# Altium PCB DevKit.PcbDoc
Units mm, origin at the board's own origin, x right, y up, seen from the top; angles counter-clockwise.
Board outline 68.58 x 53.34 mm, 2 copper layers (Top Layer, Bottom Layer); 24 components, 21 nets, 88 pads, 14 vias.
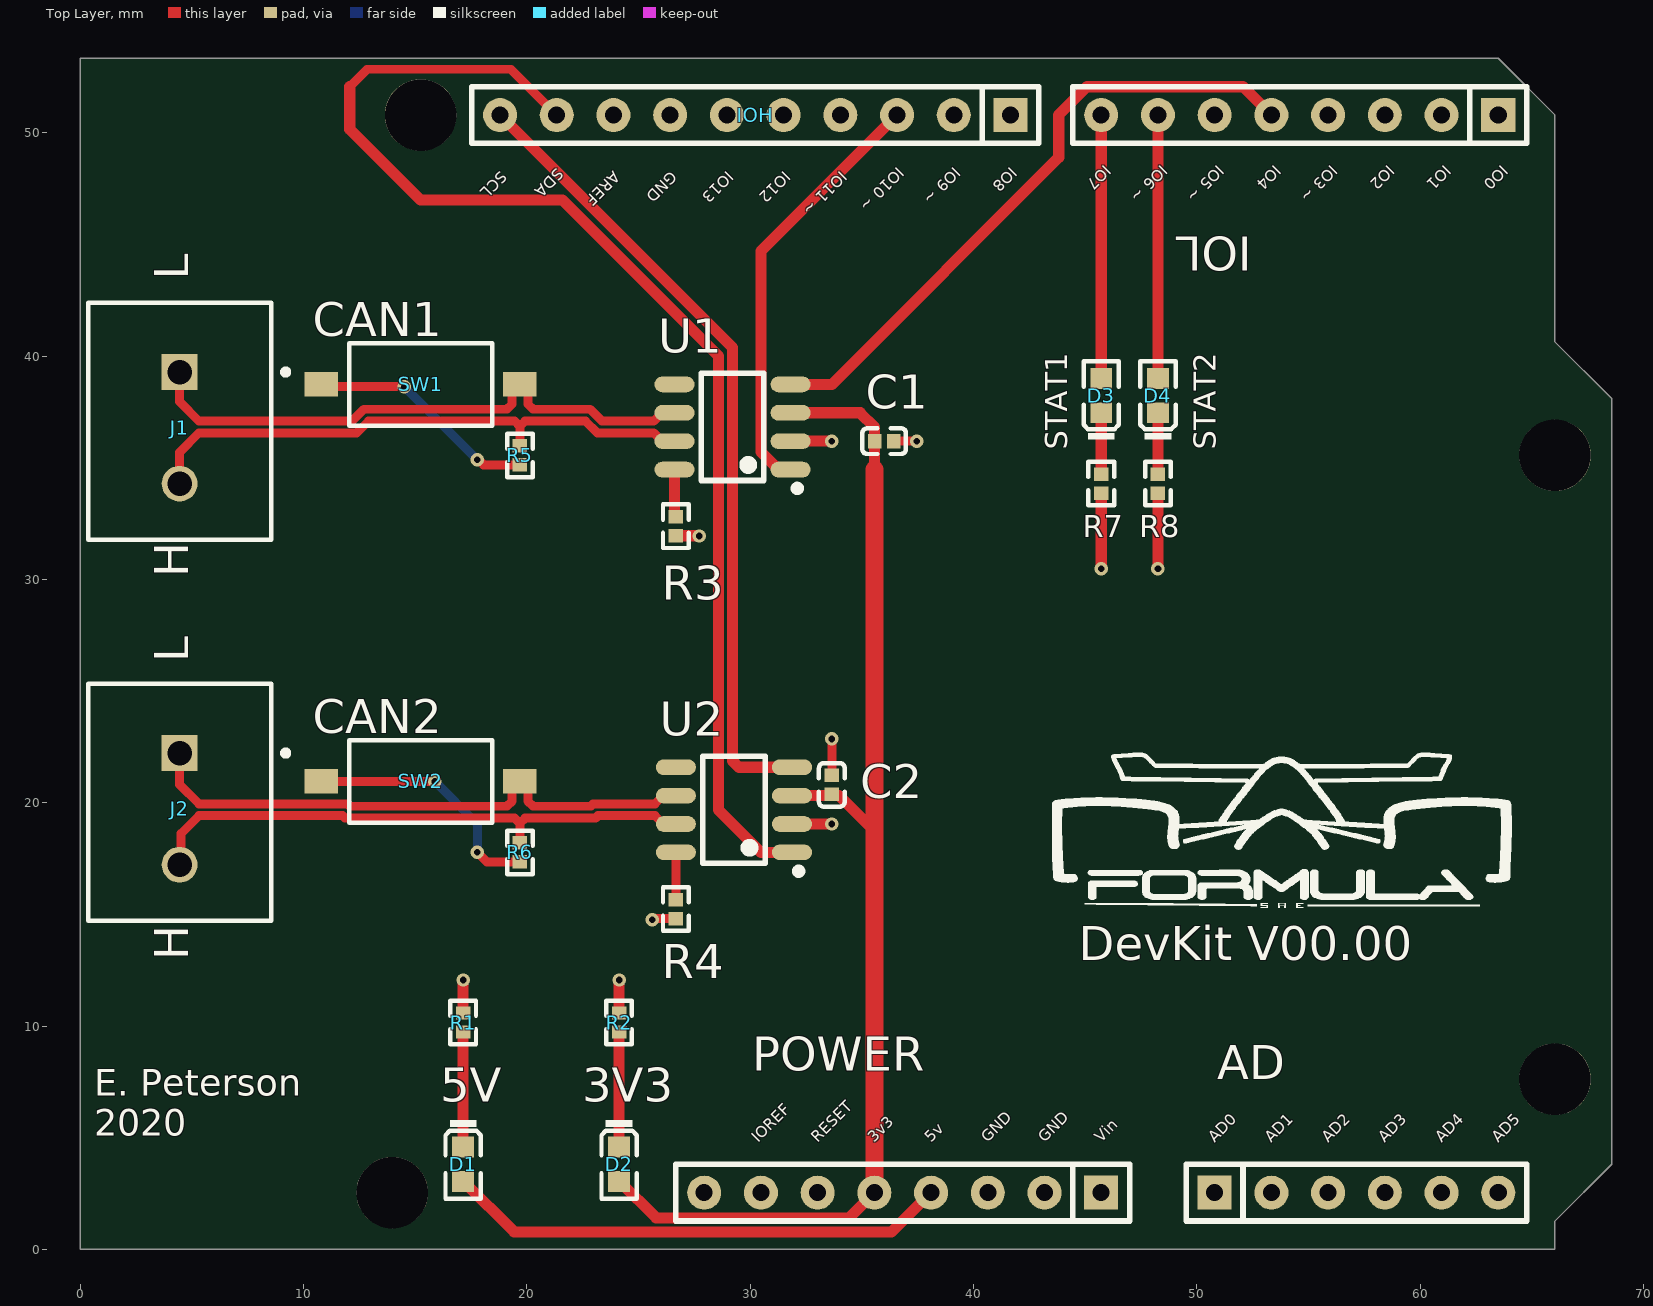
[diagram p0: Top Layer view]
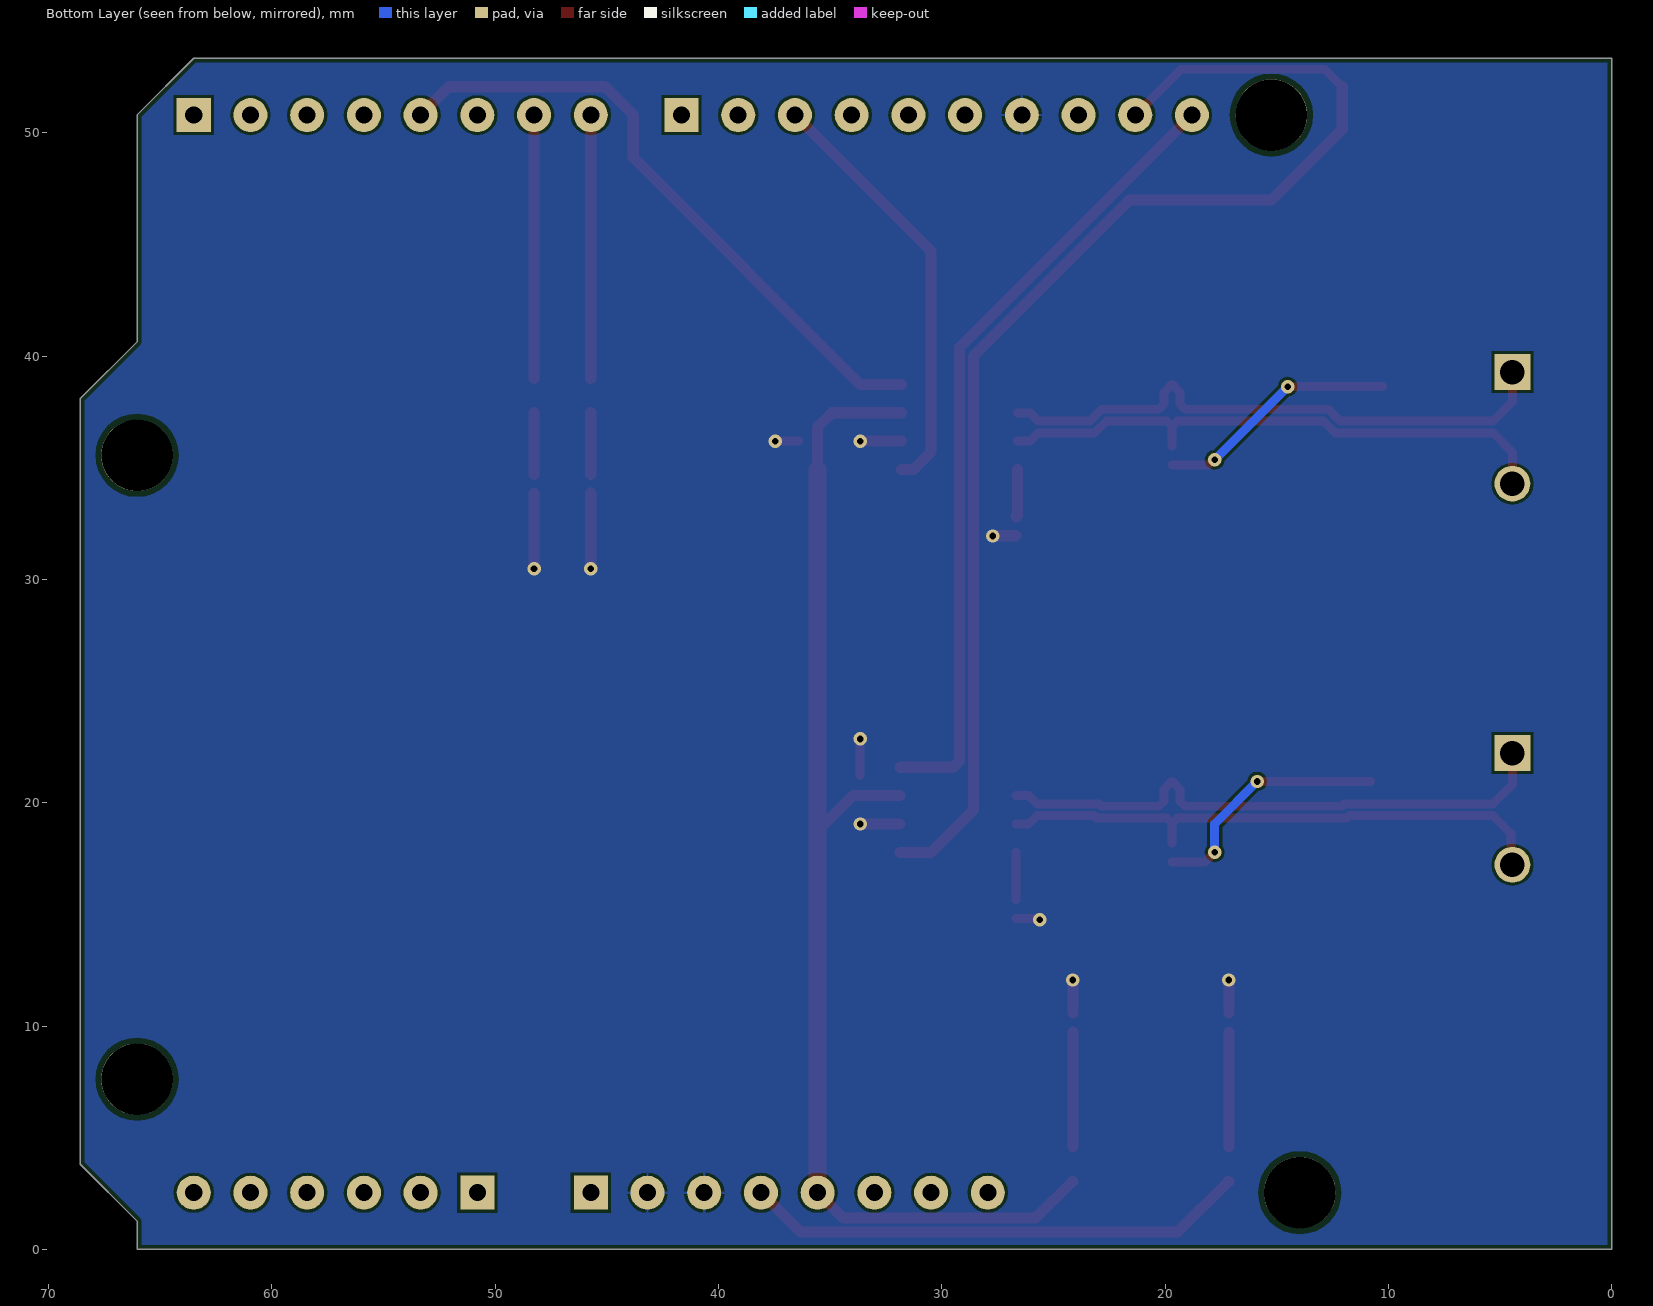
[diagram p1: Bottom Layer view, seen from below]
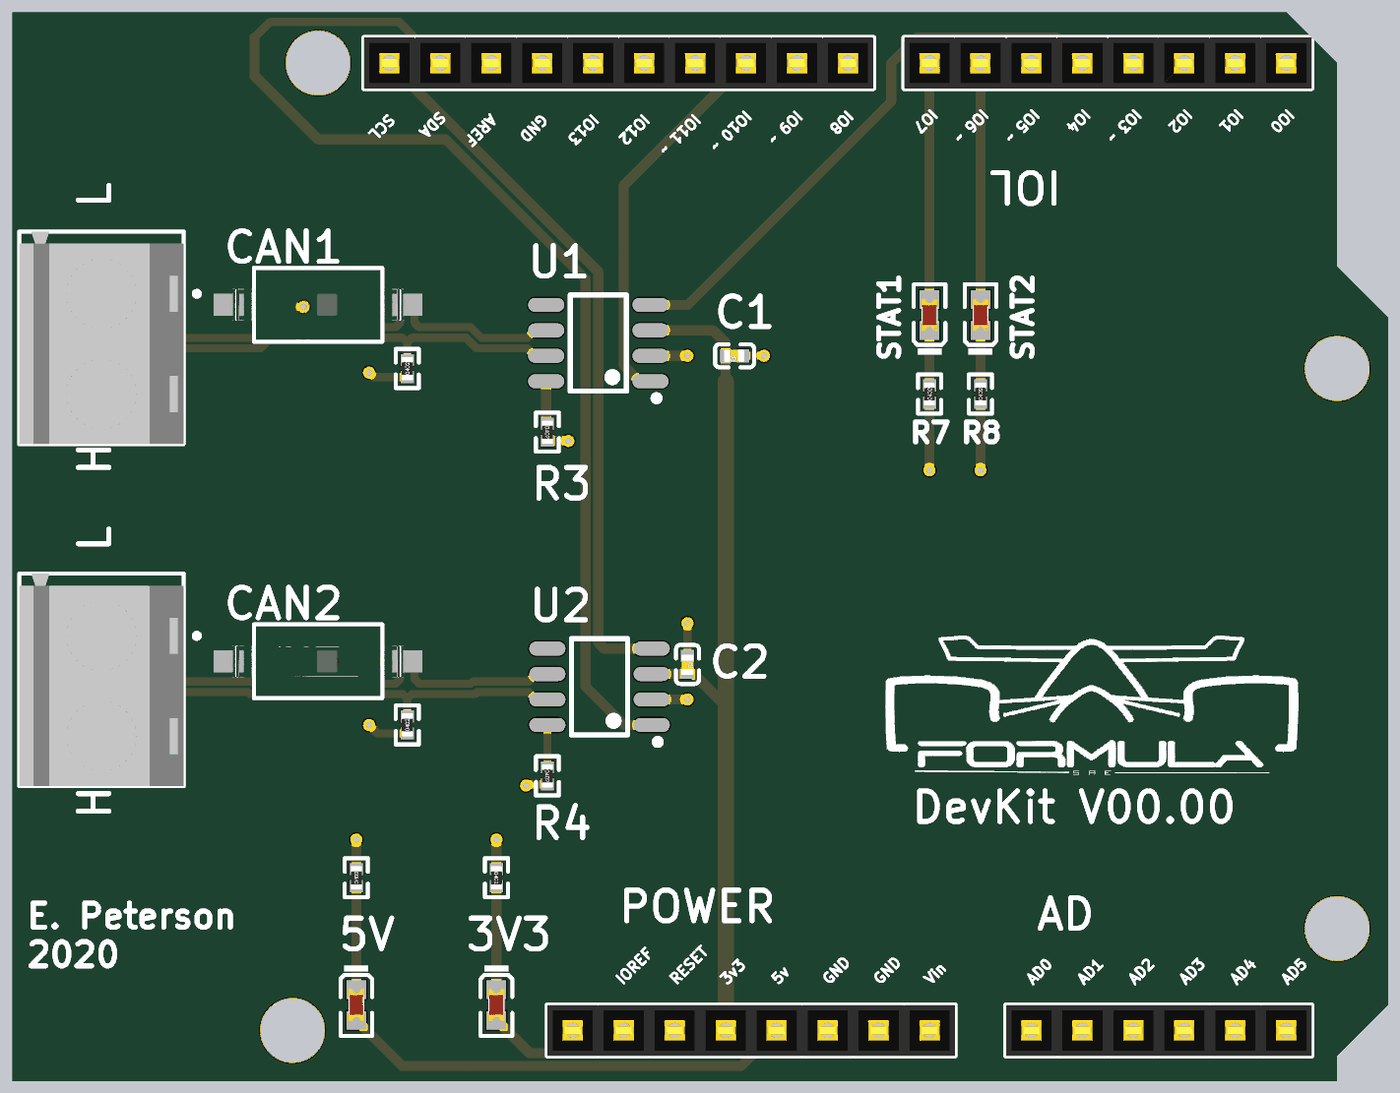
[diagram p2: 3D render of the assembled board from above, using the file's embedded part models]

## Layer stack, top to bottom
Top Solder: solder mask 0.0102, Solder Resist, Dk 3.5
Top Layer: signal copper 0.0356
Dielectric1: dielectric 0.32, FR-4, Dk 4.8
Bottom Layer: signal copper 0.0356
Bottom Solder: solder mask 0.0102, Solder Resist, Dk 3.5

## Board outline
0,0 0,53.34 63.5,53.34 66.04,50.8 66.04,40.64 68.58,38.1 68.58,3.81 66.04,1.27 66.04,0

## Design rules (kind name [scope] priority, off if disabled: settings)
BoardOutlineClearance [All] p1: gap=0.2 ignorepadtopadclearanceinfootprint=FALSE
Clearance [All] p1: gap=0.127 ignorepadtopadclearanceinfootprint=FALSE except(0.25: Arc-Hole Track-Hole SMDPad-Hole THPad-Hole Via-Hole Fill-Hole Poly-Hole Region-Hole Text-Hole)
ComponentClearance [All] p1: gap=0.127 collisioncheckmode=3 verticalgap=0.127 showdistances=TRUE
DiffPairsRouting [All] p1: maxlimit=0.254 minlimit=0.127 mostfreqgap=0.127 toplayer_minwidth=0.127 toplayer_maxwidth=25.4 toplayer_prefwidth=0.127 bottomlayer_minwidth=0.127 bottomlayer_maxwidth=25.4 bottomlayer_prefwidth=0.127 maxuncoupledlength=12.7
Height [All] p1: minheight=0 maxheight=1816.048 prefheight=12.7
HoleSize [All] p1: absolutevalues=TRUE maxlimit=6.3 minlimit=0.3 maxpercent=80.000 minpercent=20.000
HoleToHoleClearance [All] p1: gap=0.25 allowstackedmicrovias=FALSE
MinimumAnnularRing [All] p1: minimumring=0.076
MinimumSolderMaskSliver [All] p1: minsoldermaskwidth=0
PlaneClearance [All] p1: clearance=0.127
PlaneConnect PlaneConnectPowerPads [InPadClass('PowerPads')] p1: planeconnectstyle=Direct reliefexpansion=0.508 reliefentries=4 reliefconductorwidth=0.254 reliefairgap=0.254
PlaneConnect [All] p2: pad.planeconnectstyle=Relief pad.reliefexpansion=0.3 pad.reliefentries=4 pad.reliefconductorwidth=0.127 pad.reliefairgap=0.127 via.planeconnectstyle=Direct via.reliefexpansion=0.3 via.reliefentries=4 via.reliefconductorwidth=0.127 via.reliefairgap=0.127
PolygonConnect PolygonConnectPowerPads [All vs (InPadClass('PowerPads'))] p1: connectstyle=Direct reliefconductorwidth=0.254 reliefentries=4 polygonreliefangle="90 Angle" airgapwidth=0.254
PolygonConnect [All] p2: thpad.connectstyle=Relief thpad.reliefconductorwidth=0.127 thpad.reliefentries=4 thpad.polygonreliefangle="90 Angle" thpad.airgapwidth=0.127 smdpad.connectstyle=Relief smdpad.reliefconductorwidth=0.127 smdpad.reliefentries=4 smdpad.polygonreliefangle="90 Angle" smdpad.airgapwidth=0.127 via.connectstyle=Direct via.reliefconductorwidth=0.127 via.reliefentries=4 via.polygonreliefangle="90 Angle" via.airgapwidth=0.127
RoutingVias [All] p1: holewidth=0.3 width=0.6 viastyle="Through Hole" minholewidth=0.3 minwidth=0.6 maxholewidth=0.6 maxwidth=6.6
SilkToSilkClearance [All] p1: silktosilkclearance=0
SilkToSolderMaskClearance [IsPad] p1: minsilkscreentomaskgap=0.127 clearancetoexposedcopper=TRUE
SolderMaskExpansion [All] p1: expansion=0.075 istentingtop=FALSE
Width [All] p1: maxlimit=25.4 minlimit=0.127 preferedwidth=0.127 minimp=50.000000 maximp=50.000000 favimp=50.000000
20 further rules are at their usual default settings.

## Classes and differential pairs
differential pair CAN2: +CAN2_P -CAN2_N
differential pair CAN1: +CAN1_P -CAN1_N

## Components (designator, comment, footprint, x,y, rotation, side; value= is the part's Value field where it differs from the comment)
AD "AD" "Header 6x1 8.5mm" 50.8,2.54 r0 top locked
C1 "100nF" 0402_C 36,36.195 r180 top
C2 "100nF" 0402_C 33.655,20.8 r270 top
D1 "0603 Green" 0603_LED_S1 17.145,3.81 r270 top
D2 "0603 Yellow" 0603_LED_S1 24.13,3.81 r270 top
D3 "0603 Blue" 0603_LED_S1 45.72,38.235 r90 top
D4 "0603 Blue" 0603_LED_S1 48.26,38.235 r90 top
IOH "IOH" "Header 10x1 8.5mm" 41.656,50.8 r180 top locked
IOL "IOL" "Header 8x1 8.5mm" 63.5,50.8 r180 top locked
J1 "282836-2" TECO-282836-2_V 4.445,36.79 r270 top
J2 "282836-2" TECO-282836-2_V 4.445,19.725 r270 top
POWER "POWER_UNO" "Header 8x1 8.5mm" 45.72,2.54 r180 top locked
R1 "470Ω ±1%" 0402_R 17.145,10.16 r90 top
R2 "330Ω ±1%" 0402_R 24.13,10.16 r270 top
R3 "10KΩ ±1%" 0402_R 26.67,32.385 r270 top
R4 "10KΩ ±1%" 0402_R 26.67,15.24 r270 top
R5 "120Ω ±1%" 0402_R 19.685,35.56 r90 top
R6 "120Ω ±1%" 0402_R 19.685,17.78 r90 top
R7 "330Ω ±1%" 0402_R 45.72,34.29 r90 top
R8 "330Ω ±1%" 0402_R 48.26,34.29 r90 top
SW1 "A6S-1104-H" FP-A6S-1104-H-MFG 15.24,38.735 r270 top
SW2 "A6S-1104-H" FP-A6S-1104-H-MFG 15.24,20.955 r270 top
U1 "CAN/SN65HVD230DR" SOIC-8_150mil 29.21,36.83 r90 top
U2 "CAN/SN65HVD230DR" SOIC-8_150mil 29.27,19.685 r90 top

## Footprints (in the part's own frame and the unit in brackets; to place one, negate y for a bottom-side part, rotate by r counter-clockwise, add the part's x,y. Pads: shape width x height; smd on the part's side, far side on the other; paste and mask are expansions set on the pad)
0402_C [mm]
  rect 0.6x0.65 smd mask+0.051: 1(-0.425,0) 2(0.425,0)
  silkscreen extent -0.97,-0.58 0.97,0.58, body extent -0.48,-0.3 0.52,0.3, height 0.2
0402_R [mm]
  rect 0.6x0.65 smd mask+0.051: 1(-0.425,0) 2(0.425,0)
  silkscreen extent -0.97,-0.58 0.97,0.58, body extent -0.57,-0.27 0.58,0.28, height 0.41
0603_LED_S1 [mm]
  rect 0.93x0.98 smd: A(0.77,0) K(-0.77,0)
  silkscreen extent -1.98,-0.79 1.54,0.79, body extent -0.8,-0.4 0.8,0.4, height 0.6
FP-A6S-1104-H-MFG [mm]
  rect 1.1x1.5 smd paste+0 mask+0: 1(0,-4.45) 2(0,4.45)
  silkscreen extent -1.84,-3.2 1.84,3.2, body extent -1.94,-5.3 1.94,5.3, height 0.25
"Header 6x1 8.5mm" [mil] "Stackable 6 pin header"
  rect 60x60 hole 30: 1(0,0)
  round 60 hole 30: 2(100,0) 3(200,0) 4(300,0) 5(400,0) 6(500,0)
  silkscreen extent -50,-50 550,50, body extent -50,-50 550,50, height 335
"Header 8x1 8.5mm" [mil] "Stackable 8 pin header"
  rect 60x60 hole 30: 1(0,0)
  round 60 hole 30: 2(100,0) 3(200,0) 4(300,0) 5(400,0) 6(500,0) 7(600,0) 8(700,0)
  silkscreen extent -50,-50 750,50, body extent -50,-50 750,50, height 335
"Header 10x1 8.5mm" [mil] "Stackable 10 pin header"
  rect 60x60 hole 30: 1(0,0)
  round 60 hole 30: 2(100,0) 3(200,0) 4(300,0) 5(400,0) 6(500,0) 7(600,0) 8(700,0) 9(800,0) 10(900,0)
  silkscreen extent -50,-50 950,50, body extent -50,-50 950,50, height 335
SOIC-8_150mil [mm]
  oval 0.7x1.8 smd: 1(-1.905,-2.6) 2(-0.635,-2.6) 3(0.635,-2.6) 4(1.905,-2.6) 5(1.905,2.6) 6(0.635,2.6) 7(-0.635,2.6) 8(-1.905,2.6)
  silkscreen extent -2.9,-3.05 2.4,1.4
TECO-282836-2_V [mm] "Female Header, Pitch 5mm, 1 x 2 Position, Height 10mm"
  rect 1.6x1.6 hole 1.1: 1(-2.5,0)
  round 1.6 hole 1.1: 2(2.5,0)
  silkscreen extent -5.6,-4.1 5,4.88, body extent -5.6,-4.1 5,4.1, height 10

## Part data
AD: Supplier Part Number 1=2699089, Supplier 1=Arrow, Supplier 2=Digi-Key, Supplier 3=Arrow, Supplier 4=Arrow, Supplier Part Number 2=SAM1198-06-ND, Supplier Part Number 3=2699088, Supplier Part Number 4=2699075
C1 C2: library part "0402 100nF (104) 10% 16V", "Chip capacitors", Manufacturer="Samsung Electro-Mechanics", Package=0402, PartNumber=CL05B104KO5NNNC, SuppliersPartNumber=C1525, Tolerance=10%, Voltage=16V, Capacitance=100nF, ComponentLink1Description="Supplier link", ComponentLink1URL=http://www.szlcsc.com/product/details_1877.html, Supplier=LC
D1: library part "0603 LED Green", "LED", Color=Green, Package=0603, SuppliersPartNumber=C72043, ComponentLink1Description=供应商链接, ComponentLink1URL=http://www.szlcsc.com/product/details_73152.html, Supplier=LC
D2: library part "0603 LED Yellow", "LED", Color=Yellow, Package=0603, SuppliersPartNumber=C72038, ComponentLink1Description=供应商链接, ComponentLink1URL=http://www.szlcsc.com/product/details_73147.html, Supplier=LC
D3 D4: library part "0603 LED Blue", "LED", Color=Blue, Package=0603, SuppliersPartNumber=C72041, ComponentLink1Description=供应商链接, ComponentLink1URL=http://www.szlcsc.com/product/details_73150.html, Supplier=LC
IOH: Supplier Part Number 1=2698803S4475693N1004, Supplier 1=Arrow, Supplier 2=Digi-Key, Supplier 3=Arrow, Supplier Part Number 2=SAM1198-10-ND, Supplier Part Number 3=2698789
IOL POWER: Supplier Part Number 1=SAM1198-08-ND, Supplier 1=Digi-Key, Supplier 2=Arrow, Supplier 3=Arrow, Supplier 4=Arrow, Supplier Part Number 2=2698939, Supplier Part Number 3=2698940, Supplier Part Number 4=2698925
J1 J2: library part CMP-1684-00017-1, "Female Header, Pitch 5 mm, 1 x 2 Position, Height 10 mm, Tail Length 3.5 mm, Rohs, Bulk", Color=Green, Current=13.5A, Manufacturer="TE Connectivity", Package Description="Female Header, Pitch 5 mm, 1 x 2 Position, Height 10 mm, Tail Length 3.5 mm", Package Reference=THD, Standard Package=300, Voltage=300V, 3D Model=282836-2.pdf, Category=Connectors,Interconnects, Clamp Material - Plating=Brass-NickelPlated, Contact Material - Plating=Brass-TinPlated, Datasheet URL=http://www.te.com.cn/commerce/DocumentDelivery/DDEController?Action=showdoc&DocId=Catalog+Section%7F1308389_EUROSTYLE_TERMINAL_BLOCKS%7F0607%7Fpdf%7FEnglish%7FENG_CS_1308389_EUROSTYLE_TERMINAL_BLOCKS_0607.pdf%7F282836-2, Dynamic Catalog=BuchananSeries, Family=TerminalBlocks-WiretoBoard, Featured Product=EurostyleTerminalBlockConnectors, Features=Interlocking(Side), Housing Material=Polyamide(PA66),Nylon6/6, Manufacturer URL=http://www.te.com, Mating Orientation=HorizontalwithBoard, Mounting Type=ThroughHole, Number of Levels=1, Other Names="5ULV-02B / A98076", Packaging=Bulk, Pitch="0.197\"(5.00mm)", Positions Per Level=2, Product Training Modules=Wire-to-BoardEurostyleTerminalBlocks, RoHS Information=282836-2StatementofCompliance, Screw Material - Plating=Brass-NickelPlated, Screw Thread=M3, Series=Buchanan, Torque - Screw=0.68Nm(6Lb-In), Wire Gauge=16-30AWG, Wire Termination=Screw-RisingCageClamp
R1: library part "0402 470R (4700) 1%", "Chip resistor", Manufacturer="Uniroyal Elec", Package=0402, PartNumber=0402WGF4700TCE, Power=1/16W, Resistance=470Ω, SuppliersPartNumber=C25117, Tolerance=1%, ComponentLink1Description="Supplier link", ComponentLink1URL=http://www.szlcsc.com/product/details_25860.html, Supplier=LC
R2 R7 R8: library part "0402 330R (3300) 1%", "Chip resistor", Manufacturer="Uniroyal Elec", Package=0402, PartNumber=0402WGF3300TCE, Power=1/16W, Resistance=330Ω, SuppliersPartNumber=C25104, Tolerance=1%, ComponentLink1Description="Supplier link", ComponentLink1URL=http://www.szlcsc.com/product/details_25847.html, Supplier=LC
R3 R4: library part "0402 10K (1002) 1%", "Chip resistor", Manufacturer="Uniroyal Elec", Package=0402, PartNumber=0402WGF1002TCE, Power=1/16W, Resistance=10KΩ, SuppliersPartNumber=C25744, Tolerance=1%, ComponentLink1Description="Supplier link", ComponentLink1URL=http://www.szlcsc.com/product/details_26487.html, Supplier=LC
R5 R6: library part "0402 120R (1200) 1%", "Chip resistor", Manufacturer="Uniroyal Elec", Package=0402, PartNumber=0402WGF1200TCE, Power=1/16W, Resistance=120Ω, SuppliersPartNumber=C25079, Tolerance=1%, ComponentLink1Description="Supplier link", ComponentLink1URL=http://www.szlcsc.com/product/details_25822.html, Supplier=LC
SW1 SW2: library part CMP-08827-000005-1, "SWITCH SLIDE DIP SPST 25MA 24V", Ambient Temperature Range High=+70°C, Ambient Temperature Range Low=-20°C, Contact Current Rating=25mA, Contact Resistance=200mΩ, Manufacturer="Omron Electronics Inc-EMC Div", Package=0, Temperature="-20°C to +70°C", Voltage Rating Dc=24V, Automotive=No, Category=Switch, ComponentLink2Description=Datasheet, ComponentLink2URL=https://omronfs.omron.com/en_US/ecb/products/pdf/en-a6s.pdf, Device Class L1=Electromechanical, Device Class L2=Switches, Device Class L3="DIP Switches", Digikey Description="SWITCH SLIDE DIP SPST 25MA 24V", Electromechanical Life=1000Cycles, Height=3.95mm, Lead Free=Yes, Manufacturer Part Number=A6S-1104-H, Mount="Surface Mount", Mouser Description="DIP Switches / SIP Switches Dip Switch", Number Of Circuits=1, Octopart=https://octopart.com/a6s-1104-h-omron-55410938, RoHS=TRUE, Standoff Height=0mm, Temperature Range High=+70°C, Temperature Range Low=-20°C, Throw Configuration=SPST-NO
U1 U2: library part CAN/SN65HVD230DR_[C12084], "CAN", Package=SOIC-8_150mil, SuppliersPartNumber=C12084, ComponentLink1Description=供应商链接, ComponentLink1URL=http://www.szlcsc.com/product/details_12661.html, Supplier=LC

## Free pads (board coordinates)
  round 3.2 hole 3.2: 0(13.97,2.54) 0(15.24,50.8) 0(66.04,7.62) 0(66.04,35.56)

## Via types
v1: diameter 0.6, hole 0.3, Top Layer to Bottom Layer, 14 vias

## Nets (pads, with @x,y where several pads share a name; then routed paths per layer and width w, separated by ;. In a path a pad name is that pad's centre, name@x,y a point inside that pad or via, vN(x,y) a via of type N, cw(c..) or ccw(c..) an arc to the next point about the centre after c; other vN are vias at no path point)
CAN1_N: J2.1 SW2.2 U2.6 | length 25.8
  Top Layer w0.4: J2.1 4.445,20.818 5.314,19.948 11.968,19.948 12.072,19.845 19.1,19.845 19.335,20.079 19.335,20.605 19.685,20.955 SW2.2 19.695,20.955 20.045,20.605 20.045,20.079 20.28,19.845 22.862,19.845 22.966,19.948 25.736,19.948 26.107,20.32 U2.6
CAN1_P: J2.2 R6.2 U2.7 | length 25.2
  Top Layer w0.4: J2.2 4.518,17.298 4.518,18.625 5.314,19.422 11.75,19.422 11.853,19.318 19.451,19.318 19.685,19.083 ; R6.2 19.685,19.083 ; U2.7 26.107,19.05 25.736,19.422 23.184,19.422 23.08,19.318 19.919,19.318 19.685,19.083
CAN1_RX: IOH.10 U2.4 | length 36
  Top Layer w0.5: IOH.10 29.21,40.386 29.21,21.883 29.503,21.59 U2.4
CAN1_TX: IOH.9 U2.1 | length 57.5
  Top Layer w0.4: 12.065,52.07 12.845,52.85 19.286,52.85 IOH.9
  Top Layer w0.5: 12.065,52.07 12.065,50.165 15.24,46.99 21.59,46.99 28.575,40.005 28.575,22.608 28.575,19.685 30.48,17.78 U2.1
CAN2_N: J1.1 SW1.2 U1.6 | length 26
  Top Layer w0.4: J1.1 4.445,37.963 5.314,37.093 12.162,37.093 12.693,37.625 19.1,37.625 19.335,37.859 19.335,38.385 19.685,38.735 SW1.2 19.695,38.735 20.045,38.385 20.045,37.859 20.28,37.625 22.837,37.625 23.368,37.093 25.676,37.093 26.047,37.465 U1.6
CAN2_P: J1.2 R5.2 U1.7 | length 25.6
  Top Layer w0.4: J1.2 4.445,35.697 5.314,36.567 12.38,36.567 12.912,37.098 19.451,37.098 19.685,36.863 ; R5.2 19.685,36.863 ; U1.7 26.047,36.195 25.676,36.567 23.15,36.567 22.618,37.098 19.919,37.098 19.685,36.863
CAN2_RX: IOL.5 U1.4 | length 28.7
  Top Layer w0.5: U1.4 33.655,38.735 43.815,48.895 43.815,50.8 45.085,52.07 52.07,52.07 IOL.5
CAN2_TX: IOH.3 U1.1 | length 19.3
  Top Layer w0.5: U1.1 31.26,34.925 30.48,35.705 30.48,44.704 IOH.3
GND: C1.1 C2.1 IOH.7 POWER.2 POWER.3 R1.2 R2.1 R3.2 R4.2 R7.1 R8.1 U1.2 U2.2 | length 18.2
  Top Layer w0.4: v1(25.612,14.762) 25.664,14.815 R4.2 ; C2.1 v1(33.655,22.86) ; C1.1 v1(37.465,36.195)
  Top Layer w0.5: R1.2 v1(17.145,12.065) ; R2.1 v1(24.13,12.065) ; R3.2 27.703,31.96 v1(27.716,31.947) ; U1.2 v1(33.655,36.195) ; U2.2 v1(33.655,19.05) ; v1(45.72,30.48) R7.1 ; v1(48.26,30.48) R8.1
NetD1_K: D1.K R1.1 | length 5.2
  Top Layer w0.5: D1.K R1.1
NetD2_K: D2.K R2.2 | length 5.2
  Top Layer w0.5: D2.K R2.2
NetD3_K: D3.K R7.2 | length 2.7
  Top Layer w0.5: R7.2 D3.K
NetD4_K: D4.K R8.2 | length 2.7
  Top Layer w0.5: R8.2 D4.K
NetR3_1: R3.1 U1.8 | length 2.1
  Top Layer w0.5: U1.8 26.61,32.86 26.66,32.81 R3.1
NetR4_1: R4.1 U2.8 | length 2.1
  Top Layer w0.4: R4.1 U2.8
NetR5_1: R5.1 SW1.1 | length 10.9
  Top Layer w0.4: SW1.1@10.255,38.635 v1(14.513,38.635) ; v1(17.78,35.358) 17.834,35.358 18.057,35.135 R5.1
  Bottom Layer w0.4: v1(14.513,38.635) 14.513,38.63 17.78,35.363 v1(17.78,35.358)
NetR6_1: R6.1 SW2.1 | length 11.1
  Top Layer w0.4: SW2.1 v1(15.875,20.955) ; v1(17.78,17.78) 18.205,17.355 R6.1
  Bottom Layer w0.4: v1(15.875,20.955) 17.78,19.05 v1(17.78,17.78)
STATUS1: D3.A IOL.8 | length 11.8
  Top Layer w0.5: D3.A IOL.8
STATUS2: D4.A IOL.7 | length 11.8
  Top Layer w0.5: D4.A IOL.7
VCC3V3: C1.2 C2.2 D2.A POWER.5 U1.3 U2.3 | length 55.2
  Top Layer w0.5: D2.A 24.155,3.04 25.794,1.401 34.421,1.401 POWER.5 ; U1.3 34.925,37.465 35.56,36.83 35.56,34.925 ; U2.3 33.972,20.32 35.56,18.732
  Top Layer w0.8: POWER.5 35.56,18.732 35.56,34.925
VCC5V: D1.A POWER.4 | length 22.6
  Top Layer w0.5: D1.A 17.17,3.04 19.436,0.774 36.334,0.774 POWER.4
pads on no net: AD.1 AD.2 AD.3 AD.4 AD.5 AD.6 IOH.1 IOH.2 IOH.4 IOH.5 IOH.6 IOH.8 IOL.1 IOL.2 IOL.3 IOL.4 IOL.6 POWER.1 POWER.6 POWER.7 POWER.8 U1.5 U2.5

## Polygon pours and split planes (outlines as drawn)
GND on Bottom Layer "GND" (solid, remove dead copper, pour order 0): -3.175,57.785 -3.175,-3.175 70.485,-3.175 70.485,57.785

## Silkscreen, mask and mechanical layers (free items; w line width, h text height)
Top Overlay:
  drawing of 13 lines, arcs and shapes, not listed
  text "IO7" at 45.847,48.588 h0.51 r225
  text "IO6 ~" at 48.387,48.588 h0.51 r225
  text "IO5 ~" at 50.927,48.588 h0.51 r225
  text "IO4" at 53.467,48.588 h0.51 r225
  text "IO3 ~" at 56.007,48.588 h0.51 r225
  text "IO2" at 58.547,48.588 h0.51 r225
  text "IO1" at 61.087,48.588 h0.51 r225
  text "IO0" at 63.627,48.588 h0.51 r225
  text "IO10 ~" at 36.576,48.514 h0.51 r225
  text "IO9 ~" at 39.116,48.514 h0.51 r225
  text "IO8" at 41.656,48.514 h0.51 r225
  text "SDA" at 21.336,48.461 h0.51 r225
  text "SCL" at 18.796,48.334 h0.51 r225
  text "AREF" at 23.876,48.334 h0.51 r225
  text "GND" at 26.416,48.334 h0.51 r225
  text "IO13" at 28.956,48.334 h0.51 r225
  text "IO12" at 31.496,48.334 h0.51 r225
  text "IO11 ~" at 34.036,48.334 h0.51 r225
  text "L" at 4.826,43.434 h1.52 r90
  text "CAN1" at 10.414,40.894 h1.52
  text "STAT1" at 44.196,35.814 h1 r90
  text "STAT2" at 50.846,35.814 h1 r90
  text "H" at 4.826,30.099 h1.52 r90
  text "L" at 4.826,26.289 h1.52 r90
  text "CAN2" at 10.414,23.114 h1.52
  text "H" at 4.826,12.954 h1.52 r90
  text "DevKit V00.00" at 44.704,12.954 h1.52
  text "5V" at 16.129,6.604 h1.52
  text "3V3" at 22.479,6.604 h1.52
  text "E. Peterson / 2020" at 0.635,5.08 h1.2
  text "IOREF" at 30.353,4.752 h0.51 r45
  text "RESET" at 33.02,4.752 h0.51 r45
  text "3v3" at 35.56,4.752 h0.51 r45
  text "5v" at 38.1,4.752 h0.51 r45
  text "GND" at 40.64,4.752 h0.51 r45
  text "GND" at 43.18,4.752 h0.51 r45
  text "Vin" at 45.72,4.752 h0.51 r45
  text "AD0" at 50.8,4.752 h0.51 r45
  text "AD1" at 53.34,4.752 h0.51 r45
  text "AD2" at 55.88,4.752 h0.51 r45
  text "AD3" at 58.42,4.752 h0.51 r45
  text "AD4" at 60.96,4.752 h0.51 r45
  text "AD5" at 63.5,4.752 h0.51 r45
Mechanical 1:
  circle w0.127: c15.24,50.8 r1.6
  circle w0.127: c66.04,7.62 r1.6
  circle w0.127: c13.97,2.54 r1.6
  circle w0.127: c66.04,35.56 r1.6
  lines w0.127: 0,0 0,53.34 63.5,53.34 66.04,50.8 66.04,40.64 68.58,38.1 68.58,3.81 66.04,1.27 66.04,0 0,0